# EAGLE board Terrific Crift (EAGLE 9.7.0)

Size 81.9 x 47.51 mm. Coordinates in mm from the lower left corner, seen from the top.
Outline: 0,0 81.9,0 81.9,47.51 0,47.51 0,0
Copper layers (1*16): Top 0.035mm / dielectric 1.5mm / Bottom 0.035mm
Design rules "default": minimum track width 6mil, minimum drill 0.35mm, track to track 6mil, track to pad 6mil, pad to pad 6mil, via to via 6mil, smd to smd 6mil, copper to edge 40mil, drill to drill 6mil, minimum pad ring 10mil, minimum via ring 8mil, stop-mask expansion 4mil, vias tented up to drill 0mil, thermal gap 10mil

## Footprints (pad centres in the part's own frame; a part is rotated, then mirrored left to right if it is on the bottom)
BATTERY-GENERIC = drill 1.118 pad 3.15 octagon: + 2.54,0; - -2.54,0
LEDRD254W60D565H860B = drill 0.981 pad 1.581: 1 -1.27,0; 2 1.27,0
RESAD1016W63L850D250B = drill 0.83 pad 1.43: 1 -5.08,0; 2 5.08,0
SWITCH-SPDT-PTH-8.5X3.7MM = drill 1.016 pad 1.88: 1 -2.54,0; 2 0,0; 3 2.54,0

## Placement (x,y rotation side)
BAT1  9V  [BATTERY-GENERIC]  8.26,8.26 180 top
D1  RED  [LEDRD254W60D565H860B]  73.85,38.72 270 top
R1  1k  [RESAD1016W63L850D250B]  60.58,40.52 0 top
S1  TOGGLE  [SWITCH-SPDT-PTH-8.5X3.7MM]  46.68,40.52 0 top

## Library data of the parts
BAT1 R1 S1 = Tinkercad
D1 = Tinkercad; CATEGORY: Opto-Electronic; SUB-CATEGORY: LED; VALUE: LED_RED

## Nets
BAT1-: BAT1.- D1.2
D1_A: D1.1 R1.2
S1_S: R1.1 S1.3

## Tracks (layer width: path | path; a pad name or v marks a point on that pad's centre or on a via)
BAT1-  (1 unrouted)
D1_A  (1 unrouted)
S1_S  (1 unrouted)